# EAGLE board arduino (EAGLE 6.1)
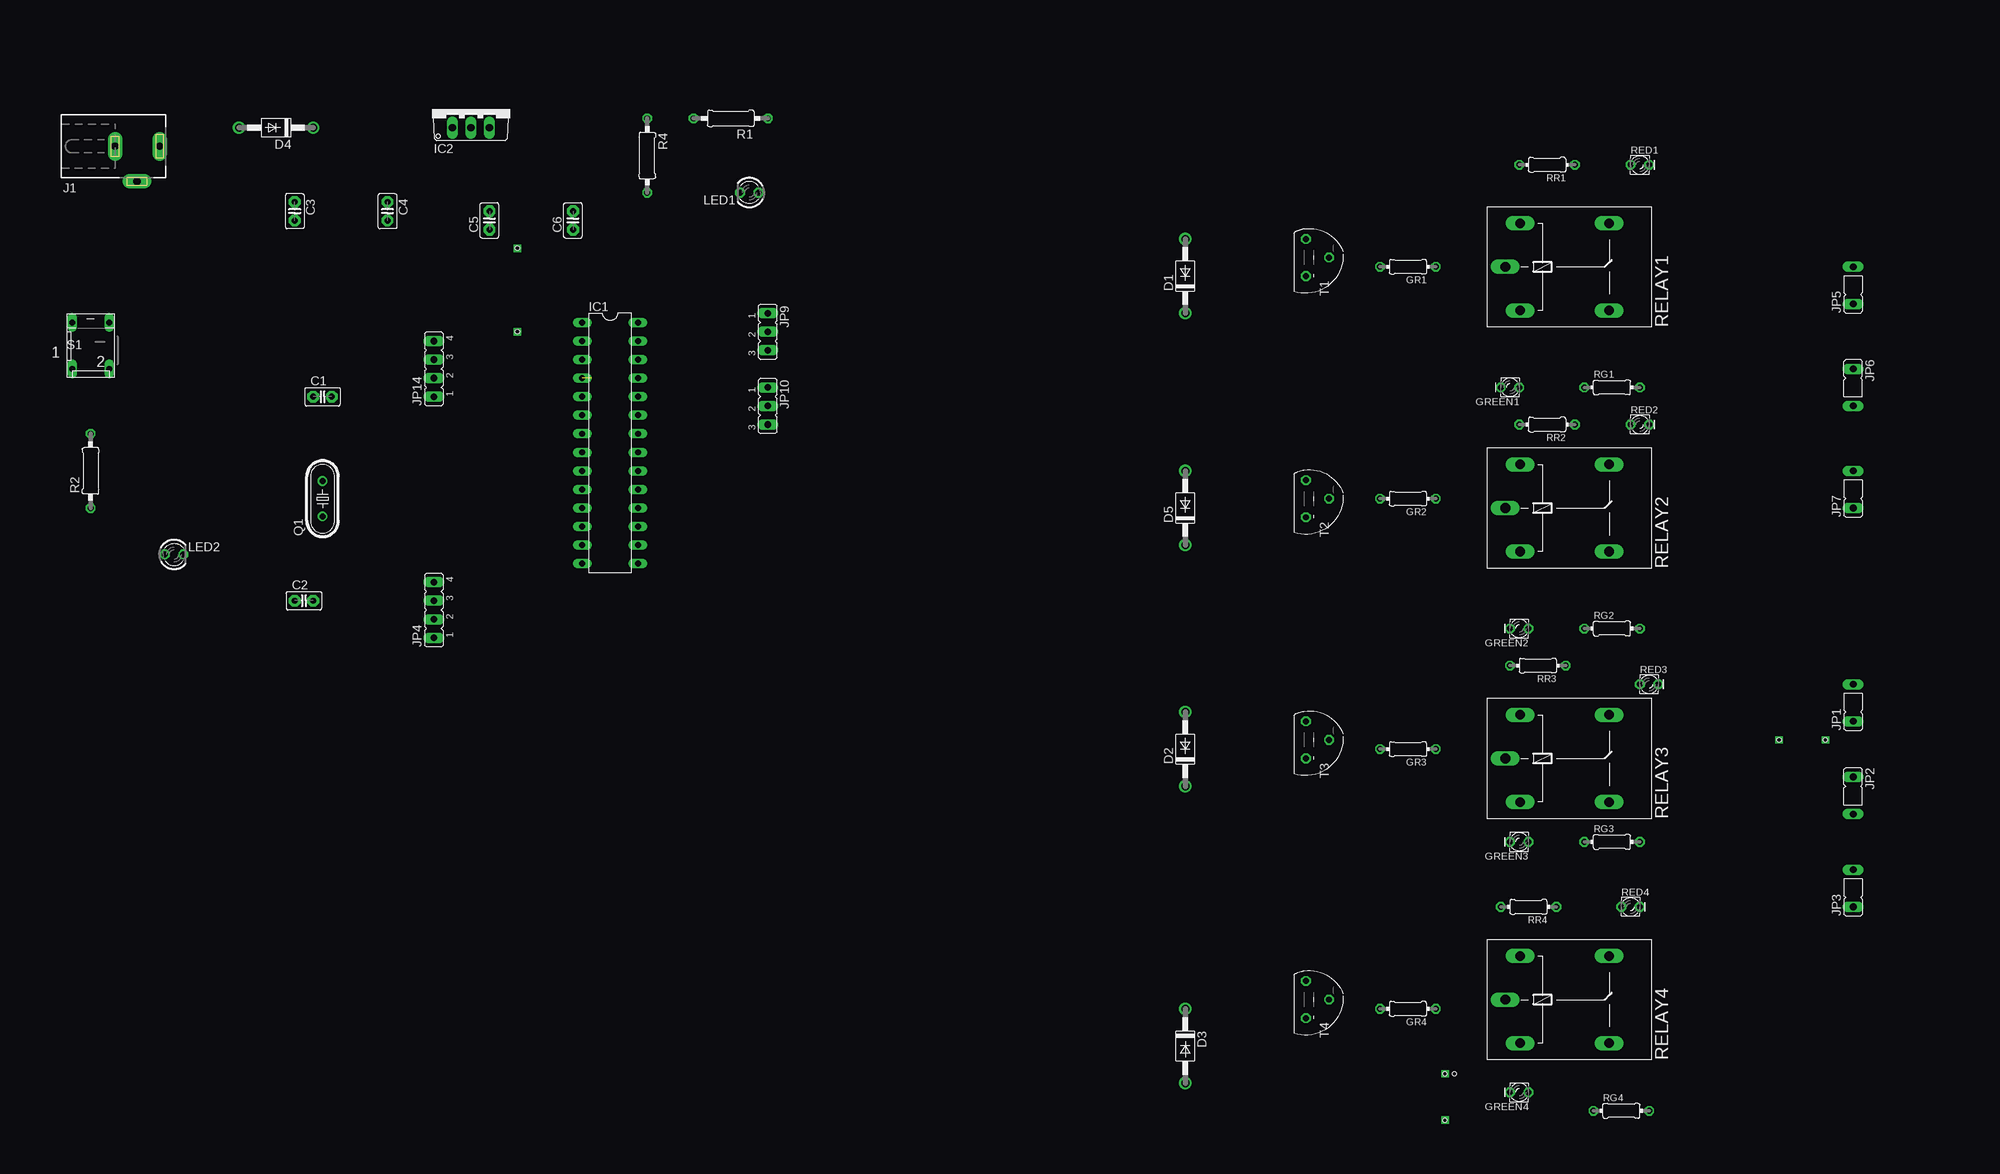
[diagram p0: board, top side]
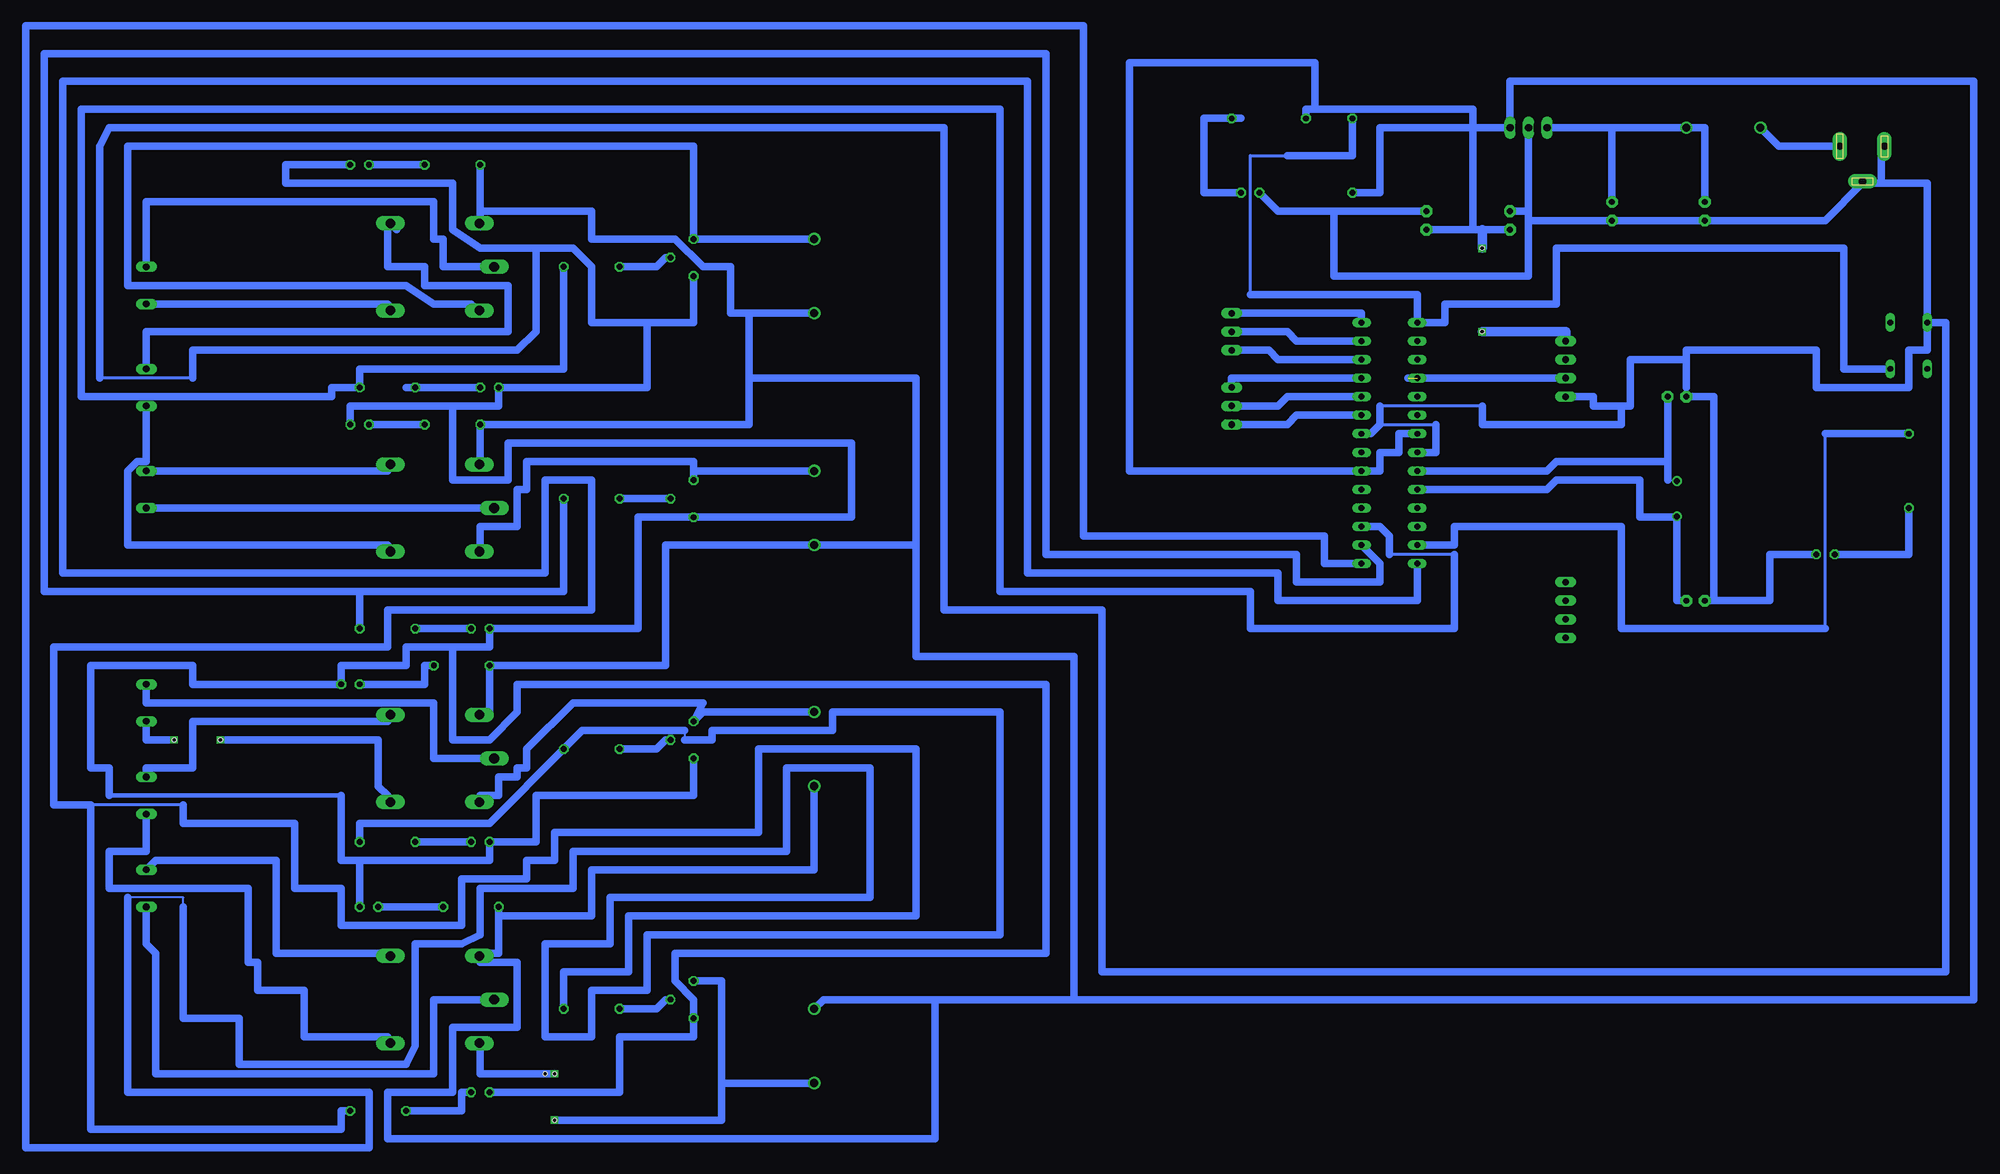
[diagram p1: board, bottom side, seen from below]

No outline drawn. Coordinates in mm, seen from the top.
Copper layers (1*16): Top 0.035mm / dielectric 1.5mm / Bottom 0.035mm
Design rules: minimum track width 10mil, minimum drill 24mil, track to track 8mil, track to pad 8mil, pad to pad 8mil, via to via 8mil, smd to smd 8mil, copper to edge 40mil, drill to drill 8mil, minimum pad ring 10mil, minimum via ring 8mil, stop-mask expansion 4mil, vias tented up to drill 0mil, thermal gap 10mil
Holes 0.6 mm at 297.18,6.35 303.53,6.35 252.73,-39.37 251.46,-45.72 251.46,-39.37 124.46,73.66 124.46,62.23

## Footprints (pad centres in the part's own frame; a part is rotated, then mirrored left to right if it is on the bottom)
C2.5-2 = drill 0.813 pad 1.6 octagon: 1 -1.27,0; 2 1.27,0
DO41-10 = drill 1.118: A 5.08,0; C -5.08,0
0204/7 = drill 0.813 octagon: 1 -3.81,0; 2 3.81,0
LED_LD260 = drill 0.813 octagon: A -1.27,0; K 1.27,0
DIL28-3 = drill 0.813 long: 1 -16.51,-3.81; 2 -13.97,-3.81; 3 -11.43,-3.81; 4 -8.89,-3.81; 5 -6.35,-3.81; 6 -3.81,-3.81; 7 -1.27,-3.81; 8 1.27,-3.81; 9 3.81,-3.81; 10 6.35,-3.81; 11 8.89,-3.81; 12 11.43,-3.81; 13 13.97,-3.81; 14 16.51,-3.81; 15 16.51,3.81; 16 13.97,3.81; 17 11.43,3.81; 18 8.89,3.81; 19 6.35,3.81; 20 3.81,3.81; 21 1.27,3.81; 22 -1.27,3.81; 23 -3.81,3.81; 24 -6.35,3.81; 25 -8.89,3.81; 26 -11.43,3.81; 27 -13.97,3.81; 28 -16.51,3.81
TO220V = drill 1.016 long: 1 -2.54,-2.54; 2 0,-2.54; 3 2.54,-2.54
DCJ0303 = drill 1 pad 2 long: 1 0,3.1; 2 4.8,0; 3 0,-3
JP1 = drill 0.914 long: 1 0,-1.27; 2 0,3.81
JP4 = drill 0.914 long: 1 -3.81,0; 2 -1.27,0; 3 1.27,0; 4 3.81,0
JP2 = drill 0.914 long: 1 -2.54,0; 2 0,0; 3 2.54,0
LED3MM = drill 0.813 octagon: A -1.27,0; K 1.27,0
HC49/S = drill 0.813: 1 -2.413,0; 2 2.413,0
0207/10 = drill 0.813 octagon: 1 -5.08,0; 2 5.08,0
G5LE = drill 1.321 long: 1 -7.493,-5.969; 2 -7.493,5.969; O 4.699,5.969; P -9.525,0; S 4.699,-5.969
DP-02 = drill 0.813 long: 1 -2.54,-2.54; 2 2.54,-2.54; 3 2.54,3.81; 4 -2.54,3.81
TO92 = drill 0.813 octagon: 1 2.54,-1.27; 2 0,1.905; 3 -2.54,-1.27

## Placement (x,y rotation side)
C1  22pf  [C2.5-2]  97.79,53.34 0 top
C2  22pf  [C2.5-2]  95.25,25.4 0 top
C3  100UF  [C2.5-2]  93.98,78.74 270 top
C4  0.1uf  [C2.5-2]  106.68,78.74 270 top
C5  0.1uf  [C2.5-2]  120.65,77.47 90 top
C6  4.7uf  [C2.5-2]  132.08,77.47 90 top
D1  1N4004  [DO41-10]  215.9,69.85 90 top
D2  1N4004  [DO41-10]  215.9,5.08 90 top
D3  1N4004  [DO41-10]  215.9,-35.56 270 top
D4  1N4007  [DO41-10]  91.44,90.17 180 top
D5  1N4004  [DO41-10]  215.9,38.1 90 top
GR1  2.2k  [0204/7]  246.38,71.12 180 top
GR2  2.2k  [0204/7]  246.38,39.37 180 top
GR3  2.2k  [0204/7]  246.38,5.08 180 top
GR4  2.2k  [0204/7]  246.38,-30.48 180 top
GREEN1  [LED_LD260]  260.35,54.61 180 top
GREEN2  [LED_LD260]  261.62,21.59 180 top
GREEN3  [LED_LD260]  261.62,-7.62 180 top
GREEN4  [LED_LD260]  261.62,-41.91 180 top
IC1  ATMEGA328  [DIL28-3]  137.16,46.99 270 top
IC2  7805  [TO220V]  118.11,92.71 0 top
J1  [DCJ0303]  72.39,87.63 270 top
JP1  [JP1]  307.34,10.16 0 top
JP2  [JP1]  307.34,0 180 top
JP3  [JP1]  307.34,-15.24 0 top
JP4  [JP4]  113.03,24.13 90 top
JP5  [JP1]  307.34,67.31 0 top
JP6  [JP1]  307.34,55.88 180 top
JP7  [JP1]  307.34,39.37 0 top
JP9  [JP2]  158.75,62.23 270 top
JP10  [JP2]  158.75,52.07 270 top
JP14  [JP4]  113.03,57.15 90 top
LED1  [LED3MM]  156.21,81.28 180 top
LED2  [LED3MM]  77.47,31.75 0 top
Q1  12MHZ  [HC49/S]  97.79,39.37 90 top
R1  220R  [0207/10]  153.67,91.44 180 top
R2  330R  [0207/10]  66.04,43.18 90 top
R4  10K  [0207/10]  142.24,86.36 270 top
RED1  [LED_LD260]  278.13,85.09 0 top
RED2  [LED_LD260]  278.13,49.53 0 top
RED3  [LED_LD260]  279.4,13.97 0 top
RED4  [LED_LD260]  276.86,-16.51 0 top
RELAY1  G5L  [G5LE]  269.24,71.12 0 top
RELAY2  G5L  [G5LE]  269.24,38.1 0 top
RELAY3  G5L  [G5LE]  269.24,3.81 0 top
RELAY4  G5L  [G5LE]  269.24,-29.21 0 top
RG1  1k  [0204/7]  274.32,54.61 0 top
RG2  1k  [0204/7]  274.32,21.59 0 top
RG3  1k  [0204/7]  274.32,-7.62 0 top
RG4  1k  [0204/7]  275.59,-44.45 0 top
RR1  2.2k  [0204/7]  265.43,85.09 180 top
RR2  2.2k  [0204/7]  265.43,49.53 180 top
RR3  2.2k  [0204/7]  264.16,16.51 180 top
RR4  2.2k  [0204/7]  262.89,-16.51 180 top
S1  [DP-02]  66.04,59.69 0 top
T1  BC547  [TO92]  233.68,72.39 270 top
T2  BC547  [TO92]  233.68,39.37 270 top
T3  BC547  [TO92]  233.68,6.35 270 top
T4  BC547  [TO92]  233.68,-29.21 270 top

## Library data of the parts
C1-C6 = capacitor-wima
D1-D5 = diode
GR1-GR4 R1 R2 R4 RG1-RG4 RR1-RR4 = rcl
GREEN1-GREEN4 RED1-RED4 = eagle-ltspice; SPICEMODEL: NONE; SPICEPREFIX: D; SPICETYPE: diode
IC1 = quantum-research-group; OC_FARNELL: unknown; OC_NEWARK: unknown
IC2 = linear
J1 = con-jack; OC_FARNELL: unknown; OC_NEWARK: unknown
JP1-JP7 JP9 JP10 JP14 = jumper
LED1 LED2 = led
Q1 = crystal; OC_FARNELL: 1667008; OC_NEWARK: unknown
RELAY1-RELAY4 = relay; OC_FARNELL: unknown; OC_NEWARK: unknown
S1 = switch-dil; MPN: MCDP02; OC_FARNELL: 1255233; OC_NEWARK: 26M1095
T1-T4 = transistor

## Nets
N$1: D1.A RELAY1.1 T1.3
N$2: JP1.1
N$3: RED1.A RR1.1
N$4: C1.2 IC1.9 Q1.2
N$5: GR1.2 T1.2
N$7: D5.A RELAY2.1 T2.3
N$8: JP5.1 RELAY1.S
N$9: JP6.1 RELAY1.O
N$10: JP5.2 RELAY1.P
N$11: GREEN1.A RG1.1
N$12: D2.A RELAY3.1 T3.3
N$13: RED2.A RR2.1
N$14: C2.2 IC1.10 Q1.1
N$15: GR2.2 T2.2
N$17: JP6.2 RELAY2.S
N$18: JP7.2 RELAY2.O
N$19: JP7.1 RELAY2.P
N$20: GREEN2.A RG2.1
N$21: C1.1 C2.1 C3.2 C4.2 C5.2 C6.2 GREEN1.K GREEN2.K GREEN3.K GREEN4.K IC1.8 IC1.22 IC2.2 J1.2 J1.3 JP14.1 LED1.K LED2.K RED1.K RED2.K RED3.K RED4.K S1.4 T1.1 T2.1 T3.1 T4.1
N$22: RED3.A RR3.1
N$23: IC1.4 JP14.2
N$24: GR3.2 T3.2
N$26: RELAY3.S
N$27: JP2.1 RELAY3.O
N$28: JP1.2 RELAY3.P
N$29: GREEN3.A RG3.1
N$30: D3.A T4.3
N$31: RED4.A RR4.1
N$32: C3.1 C4.1 D4.C IC2.1
N$33: GR4.2 T4.2
N$35: JP2.2 RELAY4.S
N$36: JP3.2 RELAY4.O
N$37: JP3.1 RELAY4.P
N$38: GREEN4.A RG4.1
N$39: D4.A J1.1
N$40: C5.1 C6.1 D1.C D2.C D3.C D5.C IC1.7 IC1.20 IC2.3 R1.2 R4.2 RELAY1.2 RELAY2.2 RELAY3.2 RELAY4.2 RR1.2 RR2.2 RR3.2 RR4.2
N$41: LED1.A R1.1
N$42: IC1.28 JP9.1
N$43: IC1.27 JP9.2
N$44: IC1.26 JP9.3
N$45: IC1.25 JP10.1
N$46: IC1.24 JP10.2
N$47: IC1.23 JP10.3
N$55: IC1.13 R2.2
N$56: GR4.1 IC1.14 RG4.2
N$57: GR3.1 IC1.15 RG3.2
N$58: GR2.1 IC1.16 RG2.2
N$59: GR1.1 IC1.17 RG1.2
N$60: IC1.18
N$61: IC1.19
N$62: IC1.1 R4.1 S1.2
N$63: LED2.A R2.1

## Tracks (layer width: path | path; a pad name or v marks a point on that pad's centre or on a via)
N$1
  Bottom 1.016: D1.A T1.3 232.41,87.63 309.88,87.63 309.88,68.58 271.78,68.58 267.97,66.04 262.89,66.04 RELAY1.1
N$3
  Bottom 1.016: RED1.A RR1.1
N$4
  Bottom 0.254: 99.06,41.91 Q1.2
  Bottom 1.016: C1.2 99.06,44.45 | 99.06,44.45 99.06,41.91 | IC1.9 115.57,43.18 114.3,44.45 99.06,44.45
N$5
  Bottom 0.254: 236.22,72.39 T1.2
  Bottom 1.016: 236.22,72.39 237.49,71.12 GR1.2
N$6  (via drill 0.6)
  Bottom 1.016: 307.34,8.89 307.34,6.35 v303.53,6.35
N$7
  Bottom 0.254: 261.62,31.75 261.62,33.02
  Bottom 1.016: D5.A 232.41,43.18 | T2.3 232.41,43.18 | 232.41,43.18 232.41,44.45 255.27,44.45 255.27,40.64 256.54,40.64 256.54,35.56 261.62,35.56 261.62,33.02 RELAY2.1
N$8
  Bottom 1.016: JP5.1 274.32,66.04 RELAY1.S
N$9
  Bottom 0.254: 273.05,76.2 274.32,76.2
  Bottom 1.016: JP6.1 307.34,62.23 257.81,62.23 257.81,68.58 269.24,68.58 269.24,71.12 274.32,71.12 274.32,76.2 | 273.05,76.2 RELAY1.O
N$10
  Bottom 0.254: 260.35,71.12 RELAY1.P
  Bottom 1.016: JP5.2 307.34,80.01 267.97,80.01 267.97,74.93 266.7,74.93 266.7,71.12 260.35,71.12
N$11
  Bottom 1.016: 271.78,54.61 RG1.1 GREEN1.A
N$12
  Bottom 0.254: 261.62,-1.27 RELAY3.1
  Bottom 1.016: D2.A 231.14,10.16 T3.3 231.14,11.43 248.92,11.43 255.27,5.08 255.27,2.54 256.54,2.54 256.54,1.27 259.08,1.27 259.08,-1.27 261.62,-1.27
N$13
  Bottom 1.016: RED2.A RR2.1
N$14
  Bottom 0.254: 97.79,36.83 Q1.1
  Bottom 1.016: C2.2 97.79,25.4 97.79,36.83 102.87,36.83 102.87,41.91 114.3,41.91 115.57,40.64 IC1.10
N$15
  Bottom 1.016: GR2.2 T2.2
N$16  (via drill 0.6)
  Bottom 1.016: 261.62,-35.56 261.62,-39.37 v251.46,-39.37
N$17
  Bottom 1.016: JP6.2 307.34,44.45 308.61,44.45 309.88,43.18 309.88,33.02 274.32,33.02 RELAY2.S
N$18
  Bottom 0.254: 274.32,43.18 RELAY2.O
  Bottom 1.016: 274.32,43.18 JP7.2
N$19
  Bottom 1.016: RELAY2.P JP7.1
N$20
  Bottom 1.016: RG2.1 GREEN2.A
N$21
  Bottom 0.254: C2.1 92.71,25.4 | 96.52,58.42 96.52,54.61 C1.1 | 69.85,87.63 J1.3 | 72.39,82.55 J1.2
  Bottom 0.406: 138.43,49.53 130.81,49.53 | 124.46,52.07 138.43,52.07 | 300.99,55.88 313.69,55.88
  Bottom 0.61: 312.42,-1.27 280.67,-1.27
  Bottom 1.016: RED2.K 279.4,52.07 265.43,52.07 | 265.43,52.07 259.08,52.07 GREEN1.K 238.76,54.61 238.76,63.5 | 238.76,63.5 232.41,63.5 T1.1 | RED1.K 288.29,85.09 288.29,82.55 265.43,82.55 265.43,76.2 261.62,73.66 254,73.66 | 254,73.66 248.92,73.66 246.38,71.12 246.38,63.5 238.76,63.5 | T3.1 232.41,-1.27 254,-1.27 254,-7.62 GREEN3.K 260.35,-10.16 278.13,-10.16 | GREEN4.K 242.57,-41.91 242.57,-34.29 232.41,-34.29 T4.1 232.41,-29.21 234.95,-26.67 234.95,-22.86 184.15,-22.86 184.15,13.97 256.54,13.97 256.54,10.16 260.35,6.35 265.43,6.35 265.43,19.05 | 265.43,19.05 260.35,19.05 GREEN2.K 240.03,21.59 240.03,36.83 T2.1 210.82,36.83 210.82,46.99 257.81,46.99 257.81,41.91 265.43,41.91 265.43,52.07 | 265.43,19.05 271.78,19.05 271.78,16.51 280.67,16.51 RED3.K 300.99,13.97 300.99,16.51 314.96,16.51 314.96,2.54 312.42,2.54 312.42,-1.27 | 280.67,-1.27 280.67,-10.16 278.13,-10.16 | 278.13,-10.16 RED4.K | 130.81,49.53 130.81,45.72 IC1.8 | IC1.22 139.7,48.26 138.43,49.53 138.43,52.07 | LED2.K 85.09,31.75 85.09,25.4 C2.1 | 92.71,25.4 92.71,53.34 C1.1 | 96.52,58.42 104.14,58.42 104.14,52.07 105.41,52.07 | 105.41,52.07 105.41,49.53 124.46,49.53 124.46,52.07 | S1.4 63.5,82.55 69.85,82.55 | 69.85,82.55 72.39,82.55 77.47,77.47 C3.2 C4.2 118.11,77.47 | 69.85,82.55 69.85,87.63 | LED1.K 152.4,78.74 144.78,78.74 | C6.2 144.78,78.74 | 118.11,78.74 IC2.2 | C5.2 118.11,78.74 | 118.11,78.74 118.11,77.47 | 144.78,78.74 144.78,69.85 118.11,69.85 118.11,77.47 | 96.52,54.61 96.52,59.69 78.74,59.69 78.74,54.61 66.04,54.61 66.04,59.69 63.5,59.69 S1.4 | S1.4 60.96,63.5 60.96,-25.4 176.53,-25.4 176.53,24.13 198.12,24.13 198.12,90.17 312.42,90.17 313.69,87.63 313.69,55.88
  Bottom 1.016: 300.99,55.88 300.99,59.69 256.54,59.69 254,62.23 254,73.66 | 105.41,52.07 109.22,52.07 109.22,53.34 JP14.1
N$22
  Bottom 1.016: RED3.A 269.24,13.97 269.24,16.51 RR3.1
N$23  (1 unrouted)
  Bottom 1.016: JP14.2 134.62,55.88
N$24
  Bottom 0.254: 236.22,6.35 T3.2
  Bottom 1.016: 236.22,6.35 237.49,5.08 GR3.2
N$26  (via drill 0.6)
  Bottom 0.254: 274.32,-1.27 RELAY3.S
  Bottom 1.016: v297.18,6.35 275.59,6.35 275.59,0 274.32,-1.27
N$27
  Bottom 1.016: JP2.1 307.34,2.54 300.99,2.54 300.99,8.89 274.32,8.89 RELAY3.O
N$28
  Bottom 1.016: JP1.2 307.34,11.43 267.97,11.43 267.97,3.81 RELAY3.P
N$29
  Bottom 1.016: RG3.1 GREEN3.A
N$30  (via drill 0.6)
  Bottom 1.016: T4.3 228.6,-26.67 228.6,-40.64 | D3.A 228.6,-40.64 | v251.46,-45.72 228.6,-45.72 228.6,-40.64
N$31
  Bottom 1.016: RED4.A RR4.1
N$32
  Bottom 1.016: 106.68,90.17 D4.C 93.98,90.17 C3.1 | 106.68,90.17 IC2.1 | 106.68,90.17 C4.1
N$33
  Bottom 1.016: GR4.2 237.49,-30.48 236.22,-29.21 T4.2
N$34  (via drill 0.6)
  Bottom 1.27: v124.46,62.23 113.03,62.23 113.03,60.96
N$35
  Bottom 0.254: 274.32,-34.29 RELAY4.S
  Bottom 1.016: JP2.2 307.34,-8.89 312.42,-8.89 312.42,-13.97 293.37,-13.97 293.37,-24.13 292.1,-24.13 292.1,-27.94 285.75,-27.94 285.75,-34.29 274.32,-34.29
N$36
  Bottom 0.254: 274.32,-22.86 RELAY4.O
  Bottom 1.016: JP3.2 306.07,-10.16 289.56,-10.16 289.56,-22.86 274.32,-22.86
N$37
  Bottom 1.016: JP3.1 307.34,-21.59 306.07,-22.86 306.07,-39.37 267.97,-39.37 267.97,-29.21 RELAY4.P
N$38
  Bottom 1.016: RG4.1 264.16,-44.45 264.16,-41.91 GREEN4.A
N$39
  Bottom 1.016: D4.A 83.82,87.63 J1.1
N$40  (via drill 0.6)
  Bottom 0.254: 261.62,44.45 RELAY2.2 | 261.62,-22.86 RELAY4.2 | 260.35,10.16 261.62,10.16 RELAY3.2 | 261.62,77.47 RELAY1.2 261.62,76.2 261.62,77.47
  Bottom 1.016: 261.62,78.74 RR1.2 | 261.62,44.45 RR2.2 224.79,49.53 224.79,55.88 | 224.79,55.88 224.79,64.77 | 224.79,64.77 D1.C | 261.62,78.74 246.38,78.74 246.38,74.93 234.95,74.93 231.14,71.12 227.33,71.12 227.33,64.77 224.79,64.77 | 261.62,78.74 261.62,77.47 | 261.62,-22.86 259.08,-22.86 RR4.2 259.08,-17.78 246.38,-17.78 246.38,-11.43 215.9,-11.43 D2.C | 260.35,10.16 RR3.2 236.22,16.51 236.22,33.02 D5.C 201.93,33.02 | 201.93,33.02 201.93,17.78 180.34,17.78 180.34,-29.21 | 180.34,-29.21 199.39,-29.21 | D3.C 214.63,-29.21 199.39,-29.21 | 199.39,-29.21 199.39,-48.26 274.32,-48.26 274.32,-41.91 265.43,-41.91 265.43,-33.02 256.54,-33.02 256.54,-24.13 261.62,-24.13 RELAY4.2 | 201.93,33.02 201.93,55.88 224.79,55.88 | C6.1 125.73,76.2 | 125.73,76.2 124.46,76.2 C5.1 | IC1.7 135.89,48.26 135.89,45.72 138.43,45.72 138.43,43.18 IC1.20 172.72,43.18 172.72,99.06 147.32,99.06 147.32,92.71 | 125.73,90.17 138.43,90.17 138.43,81.28 R4.2 | 125.73,90.17 IC2.3 120.65,96.52 57.15,96.52 57.15,-29.21 180.34,-29.21 | 147.32,92.71 148.59,92.71 R1.2 | 125.73,90.17 125.73,92.71 147.32,92.71 | 125.73,90.17 125.73,76.2
  Bottom 1.27: 124.46,76.2 v124.46,73.66
N$41
  Bottom 0.254: R1.1 157.48,91.44
  Bottom 1.016: 157.48,91.44 162.56,91.44 162.56,81.28 LED1.A
N$42
  Bottom 1.016: IC1.28 140.97,64.77 JP9.1
N$43
  Bottom 1.016: JP9.2 151.13,62.23 149.86,60.96 IC1.27
N$44
  Bottom 0.254: 142.24,58.42 IC1.26
  Bottom 1.016: JP9.3 153.67,59.69 152.4,58.42 142.24,58.42
N$45
  Bottom 1.016: JP10.1 158.75,55.88 IC1.25
N$46
  Bottom 1.016: JP10.2 152.4,52.07 151.13,53.34 IC1.24
N$47
  Bottom 1.016: JP10.3 151.13,49.53 149.86,50.8 IC1.23
N$55
  Bottom 0.406: 77.47,21.59 77.47,48.26
  Bottom 1.016: 77.47,48.26 R2.2 | 77.47,21.59 105.41,21.59 105.41,35.56 128.27,35.56 128.27,33.02 IC1.13
N$56
  Bottom 0.406: 302.26,-2.54 314.96,-2.54
  Bottom 1.016: RG4.2 280.67,-44.45 280.67,-46.99 314.96,-46.99 314.96,-2.54 320.04,-2.54 320.04,19.05 274.32,19.05 274.32,24.13 246.38,24.13 246.38,41.91 252.73,41.91 252.73,29.21 318.77,29.21 318.77,96.52 186.69,96.52 186.69,29.21 152.4,29.21 152.4,25.4 133.35,25.4 IC1.14 | 302.26,-2.54 302.26,-5.08 287.02,-5.08 287.02,-13.97 280.67,-13.97 280.67,-19.05 264.16,-19.05 264.16,-12.7 255.27,-12.7 255.27,-10.16 251.46,-10.16 251.46,-6.35 223.52,-6.35 223.52,5.08 201.93,5.08 201.93,-17.78 241.3,-17.78 241.3,-25.4 250.19,-25.4 GR4.1
N$57
  Bottom 0.254: 233.68,7.62 233.68,6.35 | 309.88,-15.24 302.26,-15.24 302.26,-16.51
  Bottom 1.016: RG3.2 278.13,-5.08 260.35,-5.08 GR3.1 247.65,7.62 233.68,7.62 | 233.68,6.35 229.87,6.35 229.87,7.62 213.36,7.62 213.36,10.16 190.5,10.16 190.5,-20.32 238.76,-20.32 238.76,-27.94 246.38,-27.94 246.38,-34.29 252.73,-34.29 252.73,-21.59 243.84,-21.59 243.84,-15.24 208.28,-15.24 208.28,2.54 219.71,2.54 219.71,-8.89 248.92,-8.89 248.92,-13.97 261.62,-13.97 261.62,-20.32 264.16,-21.59 270.51,-21.59 270.51,-35.56 271.78,-38.1 294.64,-38.1 294.64,-31.75 302.26,-31.75 302.26,-16.51 | IC1.15 146.05,30.48 146.05,34.29 179.07,34.29 179.07,104.14 323.85,104.14 323.85,-49.53 276.86,-49.53 276.86,-41.91 309.88,-41.91 309.88,-15.24
N$58
  Bottom 1.016: GR2.1 250.19,26.67 278.13,26.67 | RG2.2 278.13,26.67 | 278.13,26.67 321.31,26.67 321.31,100.33 184.15,100.33 184.15,31.75 149.86,31.75 149.86,27.94 138.43,27.94 138.43,30.48 IC1.16
N$59
  Bottom 0.406: 128.27,31.75 137.16,31.75
  Bottom 1.016: GR1.1 250.19,57.15 278.13,57.15 RG1.2 281.94,54.61 281.94,53.34 316.23,53.34 316.23,92.71 190.5,92.71 190.5,26.67 156.21,26.67 156.21,21.59 128.27,21.59 128.27,31.75 | 137.16,31.75 137.16,34.29 138.43,35.56 IC1.17
N$62
  Bottom 0.406: 151.13,86.36 156.21,86.36 156.21,67.31
  Bottom 1.016: S1.2 74.93,57.15 74.93,73.66 114.3,73.66 114.3,66.04 129.54,66.04 129.54,63.5 IC1.1 133.35,67.31 156.21,67.31 | 151.13,86.36 142.24,86.36 R4.1
N$63
  Bottom 1.016: R2.1 66.04,31.75 LED2.A